# EAGLE board ME433_HW2 (EAGLE 8.7.1)
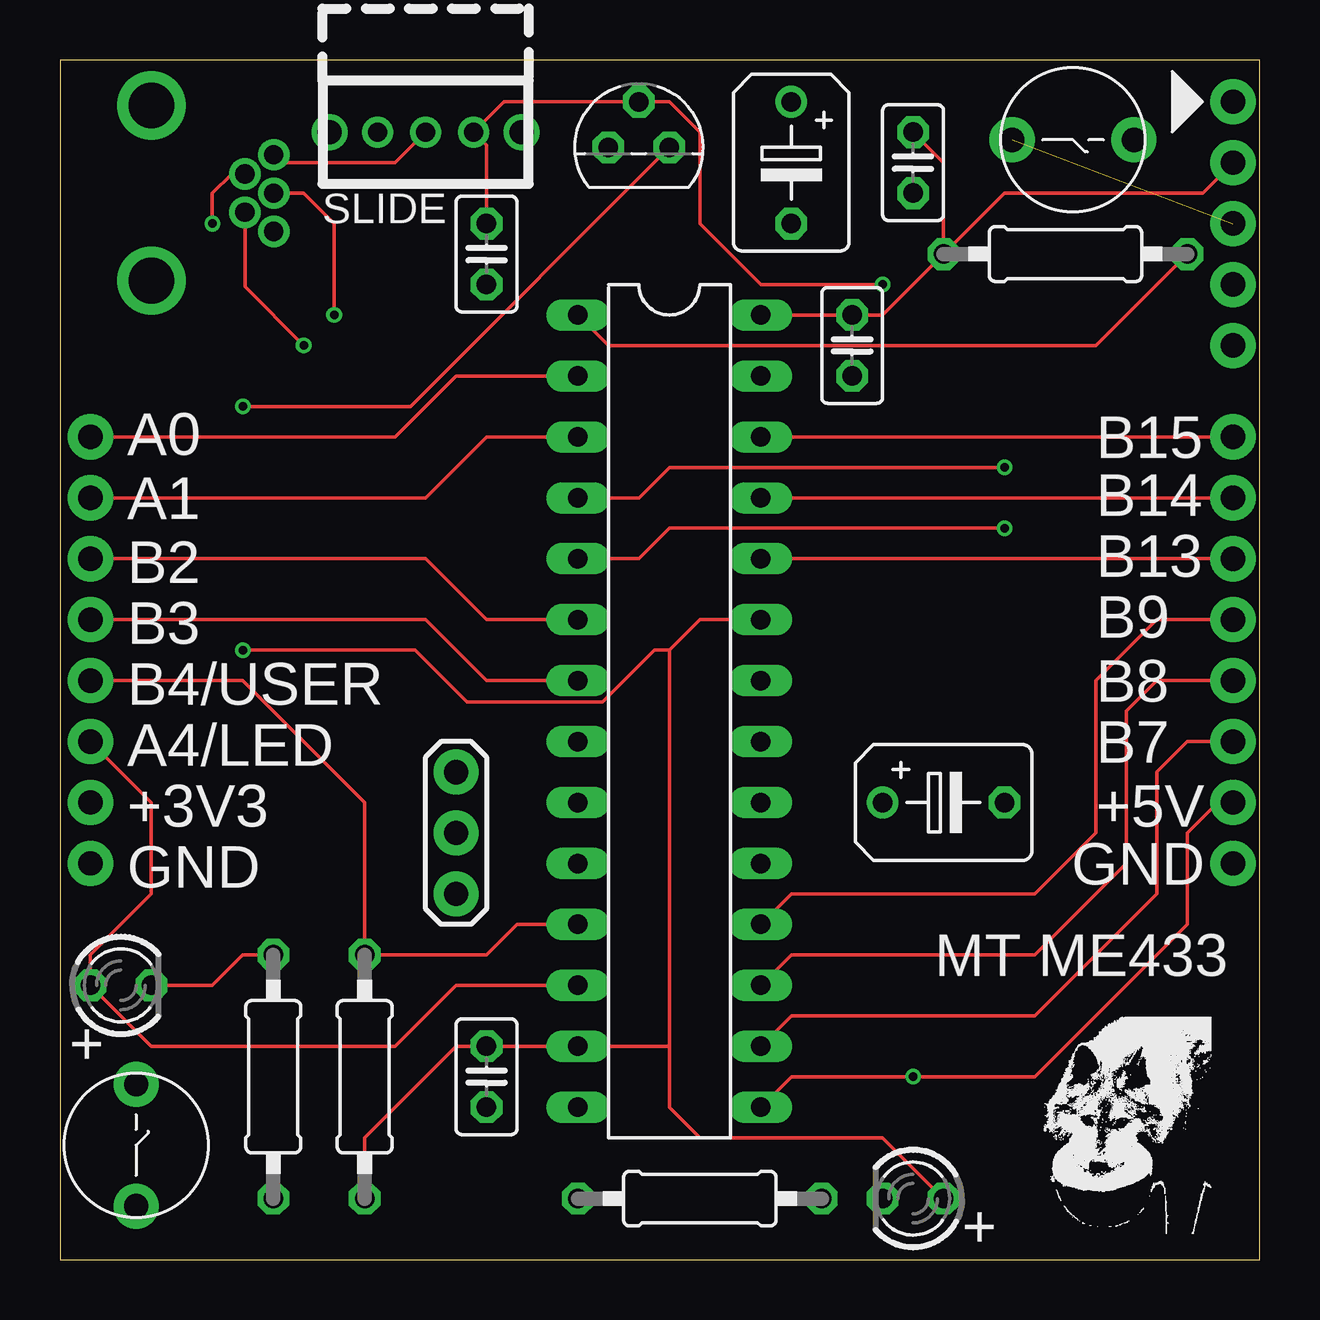
[diagram p0: board, top side]
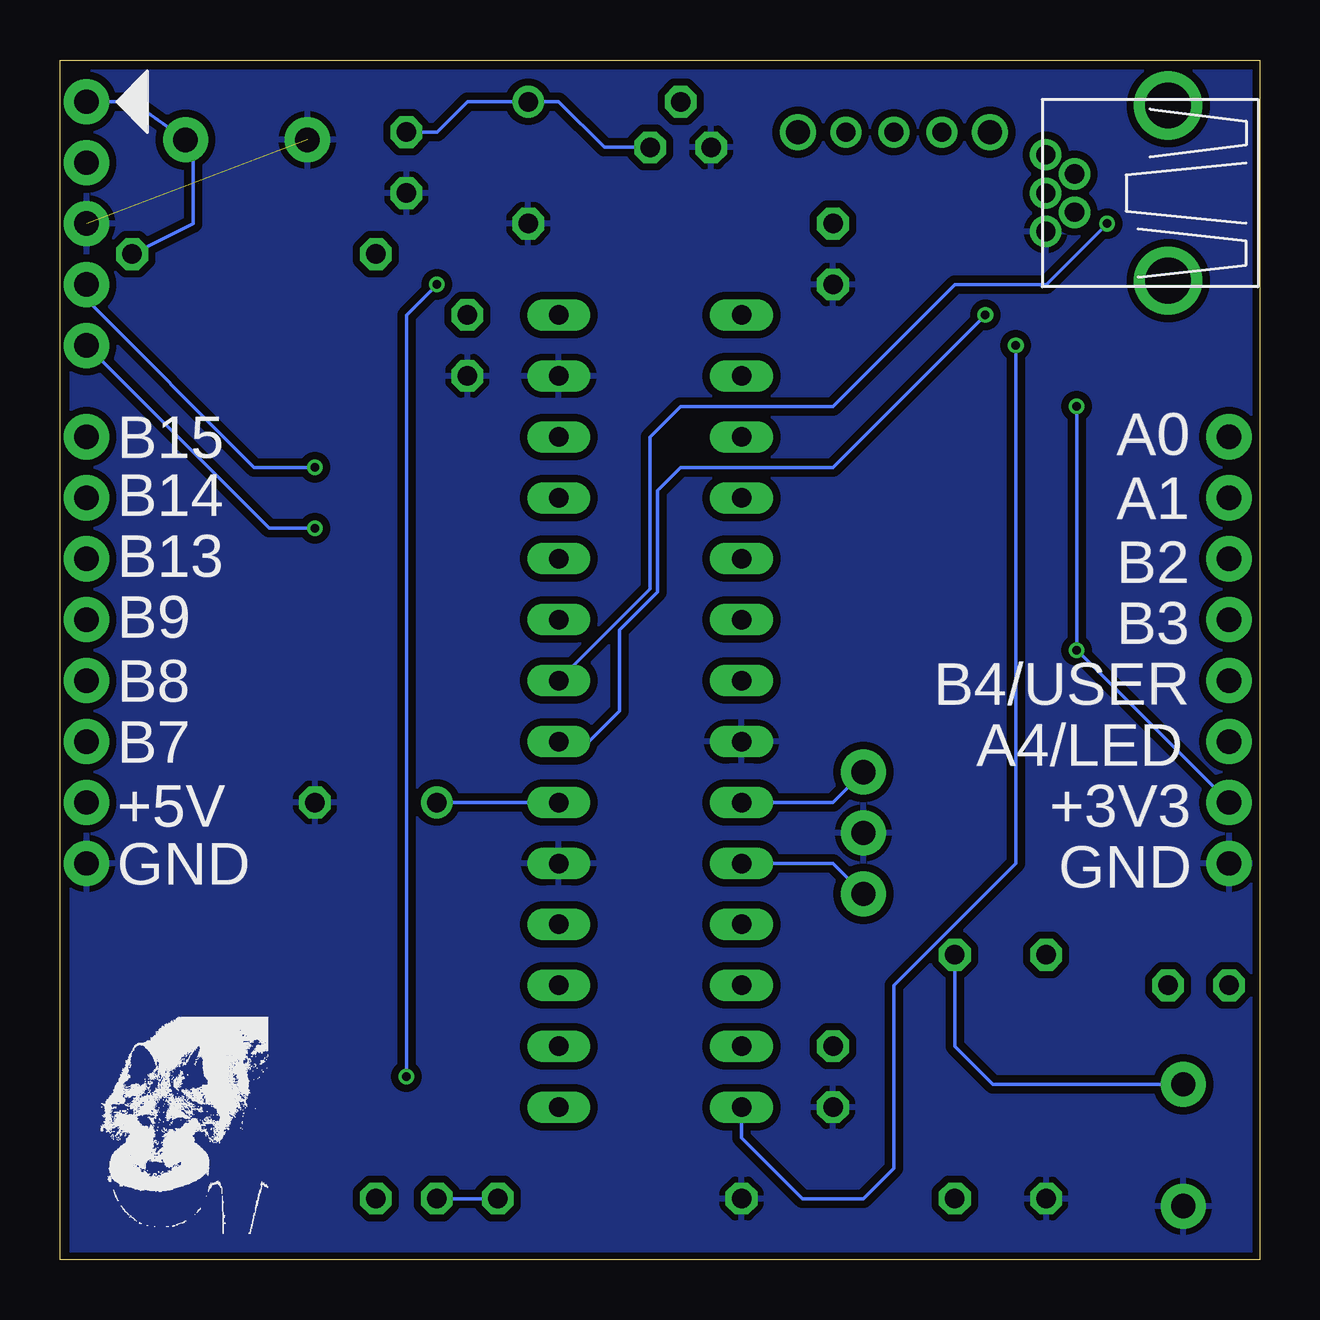
[diagram p1: board, bottom side, seen from below]

Size 50 x 50 mm. Coordinates in mm from the lower left corner, seen from the top.
Outline: 0,0 50,0 50,50 0,50 0,0
Copper layers (1*16): Top 0.035mm / dielectric 1.5mm / Bottom 0.035mm
Design rules "SeeedStudio_2layer_DRU_no_angle_20140221": minimum track width 6mil, minimum drill 12mil, track to track 6mil, track to pad 6mil, pad to pad 6mil, via to via 6mil, smd to smd 0mil, copper to edge 10mil, drill to drill 10mil, minimum pad ring 10mil, minimum via ring 6mil, stop-mask expansion 2mil, vias tented up to drill 100mil, thermal gap 10mil

## Footprints (pad centres in the part's own frame; a part is rotated, then mirrored left to right if it is on the bottom)
C025-025X050 = drill 0.813 octagon: 1 -1.27,0; 2 1.27,0
B45181B = drill 0.813: + -2.54,0 | drill 0.813 octagon: - 2.54,0
USB-MB-H = drill 0.8: D+ 5.1,0; D- 3.9,0.8; GND 5.1,-1.6; ID 3.9,-0.8; VBUS 5.1,1.6 | drill 1.9: P$6 0,-3.65; P$7 0,3.65
1X08 = drill 1.016 pad 1.88: 1 0,0; 2 2.54,0; 3 5.08,0; 4 7.62,0; 5 10.16,0; 6 12.7,0; 7 15.24,0; 8 17.78,0
LED3MM = drill 0.813 octagon: A -1.27,0; K 1.27,0
0207/10 = drill 0.813 octagon: 1 -5.08,0; 2 5.08,0
DIL28-3 = drill 0.813 long: 1 -16.51,-3.81; 2 -13.97,-3.81; 3 -11.43,-3.81; 4 -8.89,-3.81; 5 -6.35,-3.81; 6 -3.81,-3.81; 7 -1.27,-3.81; 8 1.27,-3.81; 9 3.81,-3.81; 10 6.35,-3.81; 11 8.89,-3.81; 12 11.43,-3.81; 13 13.97,-3.81; 14 16.51,-3.81; 15 16.51,3.81; 16 13.97,3.81; 17 11.43,3.81; 18 8.89,3.81; 19 6.35,3.81; 20 3.81,3.81; 21 1.27,3.81; 22 -1.27,3.81; 23 -3.81,3.81; 24 -6.35,3.81; 25 -8.89,3.81; 26 -11.43,3.81; 27 -13.97,3.81; 28 -16.51,3.81
SLIDE = drill 0.8: 1 -2,0; 2 0,0; 3 2,0 | drill 1: P$1 -4,0; P$2 4,0
TO92 = drill 0.813 octagon: 1 -1.27,0; 2 0,1.905; 3 1.27,0
PB = drill 1.016 pad 1.88: 1 -2.54,0; 2 2.54,0
1X05 = drill 1.016 pad 1.88: 1 0,0; 2 2.54,0; 3 5.08,0; 4 7.62,0; 5 10.16,0
OSC = drill 1.016 pad 1.88: 1 -2.54,0; 2 0,0; 3 2.54,0

## Placement (x,y rotation side)
C1  0.1uF  [C025-025X050]  17.78,7.62 270 top
C2  0.1uF  [C025-025X050]  35.56,45.72 270 top
C3  0.1uF  [C025-025X050]  17.78,41.91 270 top
C4  0.1uF  [C025-025X050]  33.02,38.1 270 top
C5  10uF  [B45181B]  36.83,19.05 0 top
C6  10uF  [B45181B]  30.48,45.72 270 top
J1  USB-MB-H  [USB-MB-H]  3.81,44.45 0 top
J2  [1X08]  48.9,16.51 90 top
J3  [1X08]  1.27,16.51 90 top
LED1  Red  [LED3MM]  35.56,2.54 180 top
LED2  Green  [LED3MM]  2.54,11.43 0 top
R1  330  [0207/10]  26.67,2.54 0 top
R2  330  [0207/10]  8.89,7.62 90 top
R3  10k  [0207/10]  41.91,41.91 0 top
R4  10k  [0207/10]  12.7,7.62 90 top
U$1  PIC32MX250F128B  [DIL28-3]  25.4,22.86 270 top
U$2  SLIDE  [SLIDE]  15.24,46.99 0 top
U$3  MCP1702  [TO92]  24.13,46.35 0 top
U$4  RESET  [PB]  42.23,46.67 180 top
U$5  USER  [PB]  3.17,4.76 270 top
U$6  PICKIT3  [1X05]  48.9,48.26 270 top
U$7  8MHz  [OSC]  16.51,17.78 270 top

## Library data of the parts
C1-C6 J1 LED1 LED2 R1-R4 U$1-U$7 = ME433_HW2
J2 J3 = ME433_HW2; PROD_ID: CONN-08438

## Nets
+3V3: C1.1 C2.1 C4.1 C6.+ J3.2 LED1.A R3.1 R4.1 U$1.13 U$1.23 U$1.28 U$3.3 U$6.2
+5V: C3.1 J2.2 U$1.15 U$2.3 U$3.2
A0: J3.8 U$1.2
A1: J3.7 U$1.3
A4/LED: J3.3 LED2.A U$1.12
B2: J3.6 U$1.6
B3: J3.5 U$1.7
B4/USER: J3.4 R4.2 U$1.11 U$5.1
B7: J2.3 U$1.16
B8: J2.4 U$1.17
B9: J2.5 U$1.18
B13: J2.6 U$1.24
B14: J2.7 U$1.25
B15: J2.8 U$1.26
D+/B10: J1.D+ U$1.21
D-/B11: J1.D- U$1.22
GND: C1.2 C2.2 C3.2 C4.2 C5.- C6.- J1.GND J2.1 J3.1 R1.1 R2.1 U$1.8 U$1.19 U$1.27 U$3.1 U$4.2 U$5.2 U$6.3 U$7.2
MCLR: R3.2 U$1.1 U$4.1 U$6.1
N$9: J1.VBUS U$2.2
N$10: LED2.K R2.2
N$11: LED1.K R1.2
N$12: U$1.9 U$7.1
N$13: U$1.10 U$7.3
N$14: C5.+ U$1.20
PGC: U$1.5 U$6.5
PGD: U$1.4 U$6.4
USBID: J1.ID U$1.14

## Tracks (layer width: path | path; a pad name or v marks a point on that pad's centre or on a via)
+3V3  (via drill 0.35)
  Top 0.152: R4.1 12.7,5.08 16.51,8.89 C1.1 U$1.13 25.4,8.89 | 25.4,8.89 25.4,6.35 26.67,5.08 34.29,5.08 LED1.A | C2.1 36.83,45.72 R3.1 | R3.1 34.29,39.37 C4.1 U$1.28 | R3.1 39.37,44.45 47.62,44.45 U$6.2 | U$1.23 26.67,26.67 25.4,25.4 | 25.4,25.4 25.4,8.89 | v7.62,35.56 14.61,35.56 U$3.3 | v7.62,25.4 14.81,25.4 16.97,23.24 22.62,23.24 24.78,25.4 25.4,25.4
  Bottom 0.152: U$3.3 27.3,46.35 29.21,48.26 C6.+ 33.02,48.26 34.29,46.99 C2.1 | v7.62,35.56 v7.62,25.4 J3.2
+5V  (via drill 0.35)
  Top 0.152: U$1.15 30.48,7.62 v35.56,7.62 40.64,7.62 46.99,13.97 46.99,17.78 48.26,19.05 J2.2 | C3.1 17.78,46.45 U$2.3 18.51,48.26 U$3.2 25.4,48.26 26.67,46.99 26.67,43.18 29.21,40.64 v34.29,40.64
  Bottom 0.152: v34.29,40.64 35.56,39.37 v35.56,7.62
A0
  Top 0.152: J3.8 13.97,34.29 16.51,36.83 U$1.2
A1
  Top 0.152: U$1.3 17.78,34.29 15.24,31.75 J3.7
A4/LED
  Top 0.152: J3.3 3.81,19.05 3.81,15.24 1.27,12.7 LED2.A 3.81,8.89 13.97,8.89 16.51,11.43 U$1.12
B2
  Top 0.152: J3.6 15.24,29.21 17.78,26.67 U$1.6
B3
  Top 0.152: J3.5 15.24,26.67 17.78,24.13 U$1.7
B4/USER
  Top 0.152: J3.4 7.62,24.13 12.7,19.05 R4.2 17.78,12.7 19.05,13.97 U$1.11
  Bottom 0.152: U$5.1 11.11,7.3 12.7,8.89 R4.2
B7
  Top 0.152: U$1.16 30.48,10.16 40.64,10.16 45.72,15.24 45.72,20.32 46.99,21.59 J2.3
B8
  Top 0.152: U$1.17 30.48,12.7 40.64,12.7 44.45,16.51 44.45,22.86 45.72,24.13 J2.4
B9
  Top 0.152: U$1.18 30.48,15.24 40.64,15.24 43.18,17.78 43.18,24.13 45.72,26.67 J2.5
B13
  Top 0.152: U$1.24 J2.6
B14
  Top 0.152: U$1.25 J2.7
B15
  Top 0.152: U$1.26 J2.8
D+/B10  (via drill 0.35)
  Top 0.152: J1.D+ 10.16,44.45 11.43,43.18 v11.43,39.37
  Bottom 0.152: v11.43,39.37 17.78,33.02 24.13,33.02 25.09,32.05 25.09,27.81 26.67,26.24 26.67,22.86 27.94,21.59 U$1.21
D-/B11  (via drill 0.35)
  Top 0.152: J1.D- 7.15,45.25 6.35,44.45 v6.35,43.18
  Bottom 0.152: v6.35,43.18 8.89,40.64 12.7,40.64 17.78,35.56 24.13,35.56 25.4,34.29 25.4,27.94 U$1.22
GND  (1 unrouted)
  pour Bottom (isolate 0.305): 0,49.53 49.53,49.53 49.53,0 0,0
MCLR
  Top 0.152: U$1.1 22.86,38.1 43.18,38.1 R3.2
  Bottom 0.152: U$6.1 46.99,48.26 U$4.1 44.45,46.35 44.45,43.18 R3.2
N$9
  Top 0.152: J1.VBUS 9.24,45.72 13.97,45.72 U$2.2
N$10
  Top 0.152: LED2.K 6.35,11.43 7.62,12.7 R2.2
N$11
  Bottom 0.152: LED1.K R1.2
N$12
  Bottom 0.152: U$7.1 17.78,19.05 U$1.9
N$13
  Bottom 0.152: U$7.3 17.78,16.51 U$1.10
N$14
  Bottom 0.152: U$1.20 C5.+
PGC  (via drill 0.35)
  Top 0.152: U$1.5 24.13,29.21 25.4,30.48 v39.37,30.48
  Bottom 0.152: v39.37,30.48 41.27,30.48 U$6.5
PGD  (via drill 0.35)
  Top 0.152: U$1.4 24.13,31.75 25.4,33.02 v39.37,33.02
  Bottom 0.152: v39.37,33.02 41.91,33.02 48.9,40.01 U$6.4
USBID  (via drill 0.35)
  Top 0.152: J1.ID 7.71,40.55 v10.16,38.1
  Bottom 0.152: v10.16,38.1 10.16,16.51 15.24,11.43 15.24,3.81 16.51,2.54 19.05,2.54 21.59,5.08 U$1.14

## Text on the board
tPlace: A0 | B15 | A1 | B14 | B2 | B13 | B3 | B9 | B4/USER | B8 | A4/LED | B7 | +3V3 | +5V | GND | GND | MT ME433 | + | +
bPlace: A0 | B15 | A1 | B14 | B2 | B13 | B3 | B9 | B4/USER | B8 | A4/LED | B7 | +3V3 | +5V | GND | GND